# Altium PCB PFSMPS20.PcbDoc (part 3 of 3)
Units mm, origin at the board's own origin, x right, y up, seen from the top; angles counter-clockwise.
Board outline 225.58 x 155.55 mm, 3 copper layers (Top Layer, Mid-Layer 3, Bottom Layer); 286 components, 176 nets, 1075 pads, 309 vias.
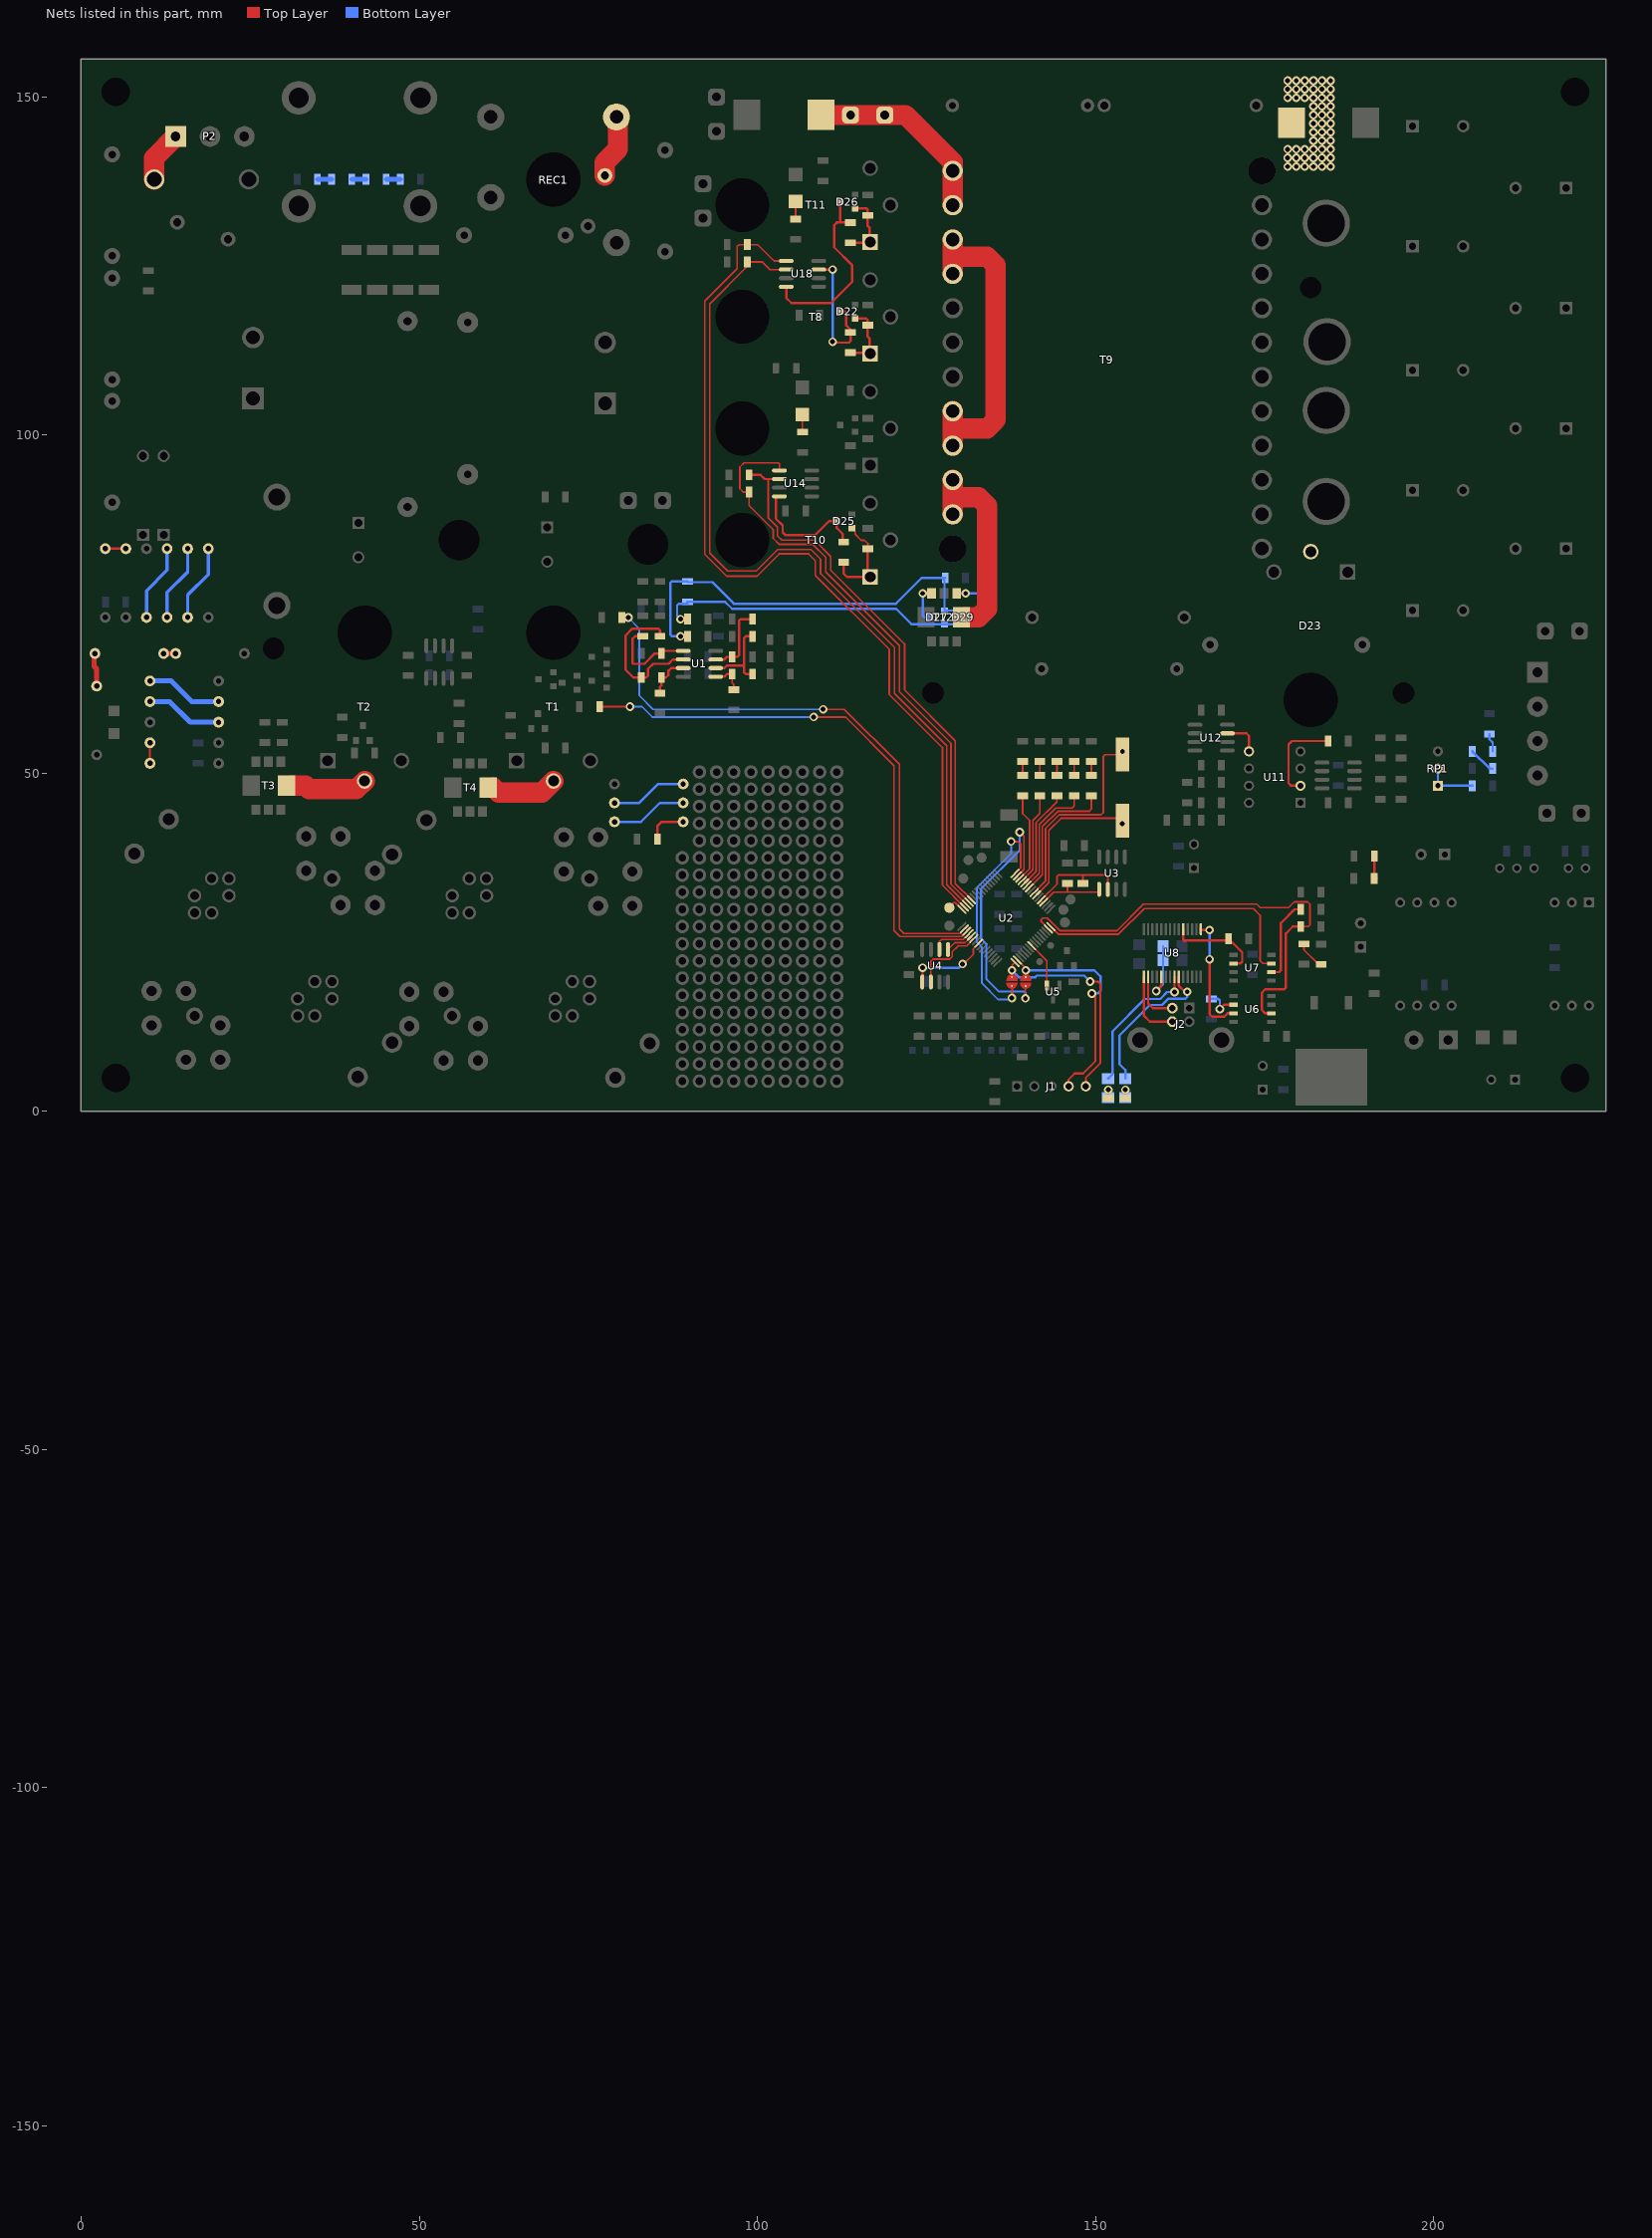
[diagram p3: the nets of this part, all layers, seen from the top]

## Via types
v1: diameter 1.27, hole 0.711, Top Layer to Bottom Layer, 309 vias

## Nets (pads, with @x,y where several pads share a name; then routed paths per layer and width w, separated by ;. In a path a pad name is that pad's centre, name@x,y a point inside that pad or via, vN(x,y) a via of type N, cw(c..) or ccw(c..) an arc to the next point about the centre after c; other vN are vias at no path point) (continued)
NetD22_1: D22.1 R77.1 R78.1 T8.1 | length 9.8
  Top Layer w0.35: R77.1@113.792,112.165 T8.1@116.556,112.165 ; D22.1@114.478,117.221 116.078,117.221 116.332,116.967 R78.1@116.332,116.229 116.332,114.554 116.586,114.3 116.586,112.134 T8.1@116.69,112.031
NetD22_3: D22.3 R77.2 U18.7 | length 20.4
  Top Layer w0.35: U18.7@109.08,124.46 v1(111.125,124.46) ; v1(111.125,113.792) 111.252,113.665 113.538,113.665 113.792,113.919 R77.2@113.792,115.165 113.792,115.57 113.157,116.205 113.157,117.983 112.903,118.237 D22.3@112.268,118.237
  Bottom Layer w0.35: v1@111.125,114.3 v1(111.125,124.46)
NetD23_2: D23.2 L8.1
  other v1: 178.435,139.7 179.705,139.7 180.975,139.7 182.245,139.7 183.515,139.7 184.785,139.7 178.435,140.97 179.705,140.97 180.975,140.97 182.245,140.97 183.515,140.97 184.785,140.97 178.435,142.24 179.705,142.24 180.975,142.24 182.245,142.24 183.515,142.24 184.785,142.24 182.245,143.51 183.515,143.51 184.785,143.51 182.245,144.78 183.515,144.78 184.785,144.78 182.245,146.05 183.515,146.05 184.785,146.05 182.245,147.32 183.515,147.32 184.785,147.32 182.245,148.59 183.515,148.59 184.785,148.59 178.435,149.86 179.705,149.86 180.975,149.86 182.245,149.86 183.515,149.86 184.785,149.86 178.435,151.13 179.705,151.13 180.975,151.13 182.245,151.13 183.515,151.13 184.785,151.13 178.435,152.4 179.705,152.4 180.975,152.4 182.245,152.4 183.515,152.4 184.785,152.4
NetD25_1: D25.1 R89.1 R91.1 T10.1 | length 14.5
  Top Layer w0.254: D25.1@113.97,86.233 114.452,85.75 114.452,85.319 115.341,84.43 115.875,84.43 116.332,83.972 R91.1@116.332,83.185
  Top Layer w0.35: R89.1@112.776,81.177 112.776,79.502 113.267,79.011 T10.1@116.69,79.011 116.332,79.368 R91.1@116.332,83.185
NetD25_3: D25.3 R89.2 U14.4 | length 18.1
  Top Layer w0.35: U14.4@102.743,90.805 102.743,87.63 103.759,86.614 103.759,85.598 104.14,85.217 108.585,85.217 110.617,87.249 D25.3@111.76,87.249 111.76,86.233 112.649,85.344 112.649,84.304 R89.2@112.776,84.177
NetD26_1: D26.1 R90.2 R92.2 T11.1 | length 9.8
  Top Layer w0.35: R90.2@113.792,128.421 116.571,128.421 T11.1@116.69,128.541 116.586,128.644 116.586,130.683 116.332,130.937 R92.2@116.332,132.485 116.332,133.35 116.205,133.477 D26.1@114.478,133.477
NetD26_3: D26.3 R90.1 U18.4 | length 28.4
  Top Layer w0.35: U18.4@104.28,121.92 104.28,120.256 105.029,119.507 110.871,119.507 114.046,122.682 114.046,125.095 111.379,127.762 111.379,131.04 111.76,131.421 112.117,131.421 ; D26.3@112.141,134.366 D26.3@112.268,134.493 112.268,131.572 112.117,131.421 ; R90.1@113.768,131.445 R90.1@113.792,131.421 112.117,131.421
NetD27_1: D27.1 D29.1 R2.1 R95.2 R99.1 | length 62.5
  Top Layer w0.35: v1(88.646,70.231) R2.1@89.686,70.231
  Bottom Layer w0.35: v1(88.646,70.231) 87.376,70.231 87.122,70.485 87.122,78.105 87.376,78.359 89.638,78.359 R95.2@89.662,78.335 89.765,78.232 93.345,78.232 96.52,75.057 120.498,75.057 124.308,78.867 R99.1@127.786,78.867 ; R99.1@127.532,78.613 127.686,78.459 D27.1@127.686,74.041 D29.1@131.572,74.041
NetD27_2: D27.2 D29.2 R5.1 R95.1 | length 48.2
  Top Layer w0.35: v1(88.646,72.771) R5.1@89.686,72.771
  Bottom Layer w0.35: v1(88.646,72.771) 88.138,73.279 88.138,74.803 88.392,75.057 R95.1@89.662,75.057 ; R95.1@89.662,75.335 95.226,75.335 96.266,74.295 120.523,74.295 122.809,72.009 D27.2@127.686,72.009 D29.2@131.572,72.009
NetD27_3: D27.3 T12.3 | length 5.7
  Top Layer w0.35: v1(124.46,76.581) T12.3@125.776,76.58 T12.3@125.776,76.58
  Bottom Layer w0.35: v1(124.46,76.581) 124.46,73.279 124.714,73.025 D27.3@125.476,73.025
NetD29_3: D29.3 T12.1 | length 10.3
  Top Layer w0.35: T12.1@129.476,76.58 v1(130.81,76.581) v1(130.81,76.581)
  Bottom Layer w0.35: D29.3@129.362,73.025 132.588,73.025 133.096,73.533 133.096,76.073 132.588,76.581 v1(130.81,76.581)
NetD30_A: D30.A R96.2 | length 2.6
  Top Layer w0.254: R96.2@106.68,100.433 D30.A@106.68,103.029
NetD36_A: D36.A R112.2 | length 2.6
  Top Layer w0.35: R112.2@105.664,131.929 D36.A@105.664,134.525
NetF1_1: F1.1 P2.1 | length 7.7
  Top Layer w3: F1.1@10.795,137.795 10.795,140.97 P2.1@13.97,144.145
NetJ1_4: J1.4 JP2.1 U2.18 | length 34.3
  Top Layer w0.3: U2.18@138.468,22.352 139.697,21.123 139.697,20.828 139.697,20.165 139.697,20 JP2.1@139.697,19.84 ; J1.4@146.05,3.683 146.05,4.699 146.939,5.588 148.209,5.588 149.987,7.366 149.987,16.891 v1(149.479,17.399)
  Bottom Layer w0.35: v1(139.7,20.828) 149.86,20.828 150.749,19.939 150.749,17.78 150.368,17.399 v1(149.479,17.399)
NetJ1_5: J1.5 JP1.2 U2.17 | length 32.5
  Top Layer w0.3: JP1.2@137.671,19.835 137.671,19.995 137.671,20.16 137.671,20.828 137.671,21.555 U2.17@138.115,21.999 ; J1.5@148.59,3.683 148.59,4.953 150.758,7.121 150.758,18.787 150.368,19.177 v1(149.225,19.177)
  Bottom Layer w0.35: v1(137.668,20.828) 138.678,19.818 141.103,19.818 141.351,20.066 148.336,20.066 v1(149.225,19.177)
NetJ2_2: J2.2 U8.16 | length 7.8
  Top Layer w0.35: U8.16@157.801,19.874 157.801,15.941 158.496,15.246 161.381,15.246 J2.2@161.386,15.251
NetJ2_3: J2.3 U8.15 | length 10.3
  Top Layer w0.35: U8.15@157.151,19.874 157.151,14.172 158.072,13.251 J2.3@161.386,13.251
NetJP1_1: JP1.1 U2.48 | length 36.9
  Top Layer w0.254: v1(137.541,39.878) 138.557,39.878 138.938,39.497 138.938,35.974 U2.48@138.115,35.151
  Top Layer w0.3: v1(137.643,16.739) 137.66,16.739 137.671,16.749 137.671,18.189 137.671,18.354 JP1.1@137.671,18.514
  Bottom Layer w0.254: v1(137.541,39.878) 137.541,38.1 132.461,33.02 132.461,25.019 133.223,24.257 133.223,18.923 135.636,16.51 137.414,16.51 v1(137.643,16.739)
NetJP2_2: JP2.2 U2.47 | length 41.2
  Top Layer w0.254: v1(138.811,41.275) 139.415,40.671 139.415,35.744 ; v1(139.649,16.688) 139.649,18.195 139.649,18.361 139.649,18.519 139.649,18.594 139.649,18.631 139.855,18.837
  Top Layer w0.3: U2.47@138.468,34.798 139.415,35.744
  Bottom Layer w0.3: v1(138.811,41.275) 138.811,38.608 133.096,32.893 133.096,25.527 133.858,24.765 133.858,19.558 135.692,17.724 139.452,17.724 139.649,17.526 v1(139.649,16.688)
NetL10_1: L10.1 P8.1 P8.2 T9.1 T9.2 | length 28.7
  Top Layer w3: L10.1@109.425,147.32 P8.1@113.792,147.32 P8.2@118.872,147.32 121.92,147.32 128.905,140.335 T9.1@128.905,139.065 T9.2@128.905,133.985
NetLED1_A: LED1.A R11.2 | length 2.1
  Top Layer w0.254: R11.2@139.255,49.657 LED1.A@139.255,51.713
NetLED2_A: LED2.A R12.2 | length 2.1
  Top Layer w0.254: R12.2@141.795,49.657 LED2.A@141.795,51.713
NetLED3_A: LED3.A R13.2 | length 2.1
  Top Layer w0.254: R13.2@144.335,49.657 LED3.A@144.335,51.713
NetLED4_A: LED4.A R14.2 | length 2.1
  Top Layer w0.254: R14.2@146.875,49.657 LED4.A@146.875,51.713
NetLED5_A: LED5.A R15.2 | length 2.1
  Top Layer w0.254: R15.2@149.415,49.657 LED5.A@149.415,51.713
NetLED6_A: LED6.A R47.2 | length 6
  Top Layer w0.35: LED6.A@85.217,40.259 85.217,42.164 85.852,42.799 R47.2@89.027,42.799
NetLED7_A: LED7.A R73.2 | length 3.3
  Top Layer w0.35: R73.2@191.238,34.417 191.262,34.441 LED7.A@191.262,37.719 ; R73.2@191.544,34.466 R73.2@191.568,34.442
NetLED9_A: LED9.A R75.2 | length 4.3
  Top Layer w0.254: R75.2@180.848,24.741 180.848,23.876 183.007,21.717 LED9.A@183.388,21.717
NetNTC1_1: NTC1.1 REC1.3 | length 9.5
  Top Layer w3: NTC1.1@77.45,138.37 77.45,140.315 79.375,142.24 79.375,146.82 REC1.3@79.168,147.027
NetR1_1: R1.1 R3.2 U1.2 | length 12.1
  Top Layer w0.35: U1.2@93.84,65.532 95.123,65.532 95.504,65.913 98.044,65.913 ; R1.1@99.29,64.643 98.298,64.643 98.044,64.897 98.044,65.913 ; R3.2@99.29,70.231 98.298,70.231 98.044,69.977 98.044,65.913
NetR1_2: R1.2 R4.2 U1.1 | length 5
  Top Layer w0.254: R1.2@96.29,64.643 96.266,64.619 96.266,63.373 96.52,63.119 R4.2@96.52,62.333
  Top Layer w0.35: U1.1@93.84,64.262 95.123,64.262 95.504,64.643 R1.2@96.29,64.643
NetR6_2: R6.2 R7.2 U1.3 | length 10.9
  Top Layer w0.35: U1.3@93.84,66.802 95.123,66.802 95.504,67.183 R7.2@96.29,67.183 97.028,67.183 97.282,67.437 97.282,72.517 97.536,72.771 R6.2@99.29,72.771
NetR11_1: R11.1 U2.46 | length 13.3
  Top Layer w0.254: U2.46@138.822,34.444 138.854,34.444 140.271,35.861 140.271,42.99 139.255,44.006 R11.1@139.255,46.657
NetR12_1: R12.1 U2.45 | length 13.7
  Top Layer w0.254: U2.45@139.175,34.09 140.77,35.685 140.77,42.98 141.795,44.005 R12.1@141.795,46.657
NetR13_1: R13.1 U2.44 | length 14.9
  Top Layer w0.254: U2.44@139.529,33.737 141.224,35.432 141.224,42.672 144.272,45.72 144.272,46.594 R13.1@144.335,46.657
NetR14_1: R14.1 U2.43 | length 17.6
  Top Layer w0.254: U2.43@139.882,33.383 141.713,35.214 141.713,42.399 144.169,44.855 146.582,44.855 146.875,45.148 R14.1@146.875,46.657
NetR15_1: R15.1 U2.42 | length 20.1
  Top Layer w0.254: U2.42@140.236,33.03 142.167,34.961 142.167,42.091 144.423,44.347 149.058,44.347 149.415,44.704 R15.1@149.415,46.657
NetR16_2: R16.2 U2.36 U3.5 | length 10.2
  Top Layer w0.254: U2.36@142.357,30.908 143.858,32.409 145.859,32.409 ; R16.2@145.859,33.703 145.859,32.409 ; U3.5@150.685,32.409 150.558,32.409 145.859,32.409
NetR17_2: R17.2 U2.37 U3.6 | length 15.2
  Top Layer w0.254: U2.37@142.004,31.262 144.335,33.593 144.335,34.734 144.55,34.949 148.145,34.949 ; R17.2@148.145,33.703 148.145,34.949 ; U3.6@151.828,32.803 151.828,34.568 151.447,34.949 148.145,34.949
NetR18_2: R18.2 R20.1 | length 2.1
  Bottom Layer w0.75: R20.1@45.105,137.795 R18.2@47.185,137.795
NetR19_2: R19.2 R21.1 | length 1.8
  Top Layer w0.75: R21.1@12.192,67.691 R19.2@13.97,67.691
NetR20_2: R20.2 R22.1 | length 2.1
  Bottom Layer w0.75: R22.1@40.025,137.795 R20.2@42.105,137.795
NetR21_2: R21.2 R23.1 | length 5
  Top Layer w0.75: R21.2@2.032,67.691 1.905,67.564 1.905,65.786 2.286,65.405 R23.1@2.286,62.865
NetR22_2: R22.2 R24.1 | length 2.1
  Bottom Layer w0.75: R24.1@34.945,137.795 R22.2@37.025,137.795
NetR25_2: R25.2 R26.1 | length 11.4
  Bottom Layer w0.5: R25.2@9.652,73.025 9.652,76.962 12.7,80.01 R26.1@12.7,83.185
NetR26_2: R26.2 R27.1 | length 11.4
  Bottom Layer w0.5: R26.2@12.7,73.025 12.7,76.708 15.748,79.756 R27.1@15.748,83.185
NetR27_2: R27.2 R28.1 | length 11.4
  Bottom Layer w0.5: R27.2@15.748,73.025 15.748,76.327 18.796,79.375 R28.1@18.796,83.185
NetR29_2: R29.2 R30.1 | length 2.9
  Top Layer w0.35: R29.2@3.556,83.185 R30.1@6.477,83.185
NetR31_2: R31.2 U6.2 | length 4.9
  Top Layer w0.35: v1(168.402,15.113) 169.037,15.748 U6.2@170.428,15.748
  Bottom Layer w0.35: R31.2@167.132,16.613 168.172,16.613 168.402,16.383 v1(168.402,15.113)
NetR32_2: R32.2 U2.31 U6.6 | length 68
  Top Layer w0.254: U2.31@143.064,26.949 141.986,28.027 141.986,28.321 142.24,28.575 142.875,28.575 144.78,26.67 153.162,26.67 157.099,30.607 173.863,30.607 174.371,30.099 178.562,30.099 179.43,30.967 181.377,30.967 181.737,30.607 181.737,27.559 181.483,27.305 R32.2@180.364,27.305
  Top Layer w0.35: U6.6@176.028,14.478 175.133,14.478 174.625,14.986 174.625,17.526 175.133,18.034 177.927,18.034 178.181,18.288 178.181,26.289 179.197,27.305 R32.2@180.364,27.305
NetR33_1: R33.1 U8.23 | length 22.8
  Top Layer w0.35: U8.23@162.351,19.874 162.351,18.528 163.226,17.653 v1(163.576,17.653)
  Bottom Layer w0.35: R33.1@154.432,4.829 154.432,6.096 153.543,6.985 153.543,11.176 158.073,15.706 159.851,15.706 160.758,16.613 163.298,16.613 163.576,16.891 v1(163.576,17.653)
NetR33_2: R33.2 TX_LED1.K | length 2.4
  Top Layer w0.254: TX_LED1.K@154.432,1.953 v1(154.432,3.175)
  Bottom Layer w0.35: R33.2@154.432,2.029 v1(154.432,3.175)
NetR34_1: R34.1 U8.22 | length 21.2
  Top Layer w0.35: U8.22@161.701,19.874 v1(161.701,17.623) v1@161.798,17.526
  Bottom Layer w0.35: R34.1@151.892,4.829 152.527,5.464 152.527,11.811 157.312,16.596 159.598,16.596 160.625,17.623 v1(161.701,17.623)
NetR34_2: R34.2 RX_LED1.K | length 2.4
  Top Layer w0.254: RX_LED1.K@151.892,1.953 151.892,3.15 v1(151.917,3.175)
  Bottom Layer w0.35: R34.2@151.892,2.029 151.892,3.15 v1(151.917,3.175)
NetR35_2: R35.2 U7.2 | length 12.3
  Top Layer w0.35: U7.2@176.028,20.574 177.165,20.574 177.419,20.828 177.419,27.813 179.451,29.845 R35.2@180.364,29.845
NetR36_2: R36.2 U7.6 U8.5 | length 13.8
  Top Layer w0.35: U8.5@163.001,26.924 163.001,25.34 163.068,25.273 169.696,25.273 169.926,25.273 171.728,23.471 171.728,22.122 171.45,21.844 U7.6@170.428,21.844
NetR37_1: R37.1 R38.2 U8.19 | length 9.4
  Top Layer w0.35: v1(159.004,17.78) 159.751,18.527 U8.19@159.751,19.874
  Bottom Layer w0.35: v1(159.004,17.78) 160.017,18.793 R37.1@160.017,22.352 R38.2@160.017,24.384
NetR39_2: R39.2 R41.1 | length 11.3
  Bottom Layer w0.35: R41.1@78.867,45.593 82.55,45.593 85.344,48.387 R39.2@89.027,48.387
NetR40_2: R40.2 R42.1 | length 11.5
  Top Layer w0.75: R42.1@20.32,60.706 R42.1@20.447,60.706
  Bottom Layer w0.75: R40.2@10.16,63.627 13.335,63.627 16.383,60.579 R42.1@20.32,60.579
NetR41_2: R41.2 R47.1 | length 11.3
  Bottom Layer w0.35: R47.1@78.867,42.799 82.804,42.799 85.598,45.593 R41.2@89.027,45.593
NetR42_2: R42.2 R48.1 | length 11.5
  Top Layer w0.75: R48.1@20.32,57.658 R48.1@20.447,57.658
  Bottom Layer w0.75: R42.2@10.16,60.579 13.081,60.579 16.129,57.531 R48.1@20.32,57.531
NetR50_2: R50.2 R56.1 | length 3
  Top Layer w0.35: R56.1@10.16,51.435 R50.2@10.16,54.483
NetR64_1: R64.1 U2.3 | length 83
  Top Layer w0.254: R64.1@76.684,59.817 v1(81.153,59.817) ; v1(108.331,58.293) 113.022,58.293 120.193,51.122 120.193,26.721 121.073,25.841 130.218,25.841 U2.3@130.973,26.595
  Bottom Layer w0.254: v1(81.153,59.817) 82.931,59.817 84.455,58.293 v1(108.331,58.293)
NetR65_1: R65.1 R67.2 U1.6 | length 22.6
  Top Layer w0.35: R67.2@85.598,70.255 R67.2@85.598,70.271 ; R67.2@85.852,70.525 R67.2@85.598,70.271 ; U1.6@89.04,66.802 87.503,66.802 86.868,66.167 84.582,66.167 83.82,65.405 83.82,64.389 83.566,64.135 R65.1@82.828,64.135 81.661,64.135 80.518,65.278 80.518,70.358 81.534,71.374 85.344,71.374 85.598,71.12 R67.2@85.598,70.271
NetR65_2: R65.2 R68.2 U1.7 | length 6.6
  Top Layer w0.35: R68.2@85.598,61.825 85.598,62.738 85.828,62.968 R65.2@85.828,64.135 86.487,64.135 86.868,64.516 86.868,65.151 87.249,65.532 U1.7@89.04,65.532
NetR70_2: R70.2 R72.2 U1.5 | length 13.6
  Top Layer w0.35: R70.2@83.058,70.255 81.939,70.255 81.558,69.874 81.558,66.27 81.661,66.167 83.312,66.167 84.836,67.691 R72.2@85.828,67.691 86.209,68.072 U1.5@89.04,68.072
NetR71_1: R71.1 U2.2 | length 90.5
  Top Layer w0.254: R71.1@79.986,73.025 80.899,73.025 v1(80.923,73.001) v1@81.026,72.898 ; v1(109.728,59.436) 112.87,59.436 121.006,51.3 121.006,26.949 121.66,26.295 129.966,26.295 U2.2@130.619,26.949
  Bottom Layer w0.254: v1(80.923,73.001) 82.55,71.374 82.55,61.468 84.582,59.436 v1(109.728,59.436)
NetR81_2: R81.2 U11.2 | length 13.7
  Top Layer w0.35: U11.2@180.34,48.133 178.943,48.133 178.562,48.514 178.562,54.229 179.07,54.737 R81.2@184.428,54.737
NetR82_2: R82.2 R86.1 | length 2.8
  Bottom Layer w0.35: R82.2@208.28,55.777 208.28,54.991 208.764,54.507 R86.1@208.764,53.213
NetR86_2: R86.2 R88.1 | length 4.1
  Bottom Layer w0.35: R86.2@205.764,53.213 208.304,50.673 R88.1@208.764,50.673
NetR93_1: R93.1 RP1.1 RP1.2 | length 7.6
  Bottom Layer w0.35: RP1.2@200.66,50.673 RP1.1@200.66,48.133 R93.1@205.764,48.133
NetR101_2: R101.2 U2.61 U14.1 | length 89
  Top Layer w0.254: U14.1@103.264,94.742 103.264,95.745 103.124,95.885 98.044,95.885 97.409,95.25 97.409,92.075 97.917,91.567 R101.2@98.782,91.567 98.782,89.575 102.362,85.995 102.362,84.709 103.251,83.82 108.204,83.82 110.109,81.915 110.109,79.756 121.031,68.834 121.031,62.027 128.651,54.407 128.651,33.584 U2.61@131.326,30.908
NetR106_2: R106.2 U2.60 U14.2 | length 82.2
  Top Layer w0.254: 101.6,93.472 101.6,87.757 102.997,86.36 102.997,85.09 103.632,84.455 108.458,84.455 110.871,82.042 110.871,80.01 121.793,69.088 121.793,62.281 129.286,54.788 129.286,33.656 U2.60@131.68,31.262
  Top Layer w0.35: R106.2@98.782,94.107 100.457,94.107 101.092,93.472 101.6,93.472 U14.2@103.264,93.472
NetR116_2: R116.2 U2.63 U18.1 | length 135.7
  Top Layer w0.254: U18.1@104.28,125.73 102.489,125.73 100.076,128.143 R116.2@98.528,128.143 97.282,128.143 97.028,127.889 97.028,124.587 92.242,119.801 92.242,82.358 95.479,79.121 99.949,79.121 103.251,82.423 107.569,82.423 108.585,81.407 108.585,79.248 119.507,68.326 119.507,61.646 127.381,53.772 127.381,33.44 U2.63@130.619,30.201
NetR120_2: R120.2 U2.62 U18.2 | length 131
  Top Layer w0.254: U18.2@104.28,124.46 101.854,124.46 100.711,125.603 R120.2@98.528,125.603 98.528,124.944 92.964,119.38 92.964,82.55 95.631,79.883 99.845,79.883 103.02,83.058 107.95,83.058 109.347,81.661 109.347,79.502 120.269,68.58 120.269,61.773 128.016,54.026 128.016,33.512 U2.62@130.973,30.555
NetT1_2: T1.2 T4.7 | length 9.9
  Top Layer w3: T4.7@60.96,47.879 61.722,47.117 68.134,47.117 T1.2@69.855,48.839
NetT2_2: T2.2 T3.7 | length 11.5
  Top Layer w3: T3.7@31.115,48.133 33.147,48.133 33.655,47.625 40.701,47.625 T2.2@41.915,48.839
NetT9_3: T9.3 T9.4 T9.8 T9.9 | length 46.8
  Top Layer w3: T9.9@128.905,98.425 128.905,100.965 ; T9.8@128.905,103.505 128.905,100.965 ; T9.4@128.905,123.825 128.905,126.365 ; T9.3@128.905,128.905 128.905,126.365 ; 128.905,100.965 133.985,100.965 135.255,102.235 135.255,125.095 133.985,126.365 128.905,126.365
NetT9_10: T9.10 T9.11 T12.8 | length 29.6
  Top Layer w3: T9.11@128.905,88.265 128.905,90.805 ; T9.10@128.905,93.345 128.905,90.805 ; T12.8@130.81,73.025 132.715,73.025 133.985,74.295 133.985,89.535 132.715,90.805 128.905,90.805
NetU2_4: U2.4 U4.6 | length 6
  Top Layer w0.254: U4.6@126.936,23.911 126.936,25.082 127.241,25.387 130.472,25.387 U2.4@131.326,26.242
NetU2_5: U2.5 U4.5 | length 4.3
  Top Layer w0.254: U4.5@128.206,23.911 129.206,24.911 130.703,24.911 U2.5@131.68,25.888
NetU2_6: U2.6 U4.2 | length 11.2
  Top Layer w0.254: U4.2@125.666,19.111 125.666,22.146 126.004,22.484 128.466,22.484 128.833,22.851 128.833,23.601 129.689,24.457 130.956,24.457 U2.6@132.033,25.534
NetU2_8: U2.8 U4.1 | length 12.6
  Top Layer w0.254: v1@124.333,21.336 v1(124.444,21.225) 124.444,19.159 U4.1@124.396,19.111 ; v1(130.353,21.768) 130.429,21.844 130.596,21.844 131.953,23.201 131.953,24.04 U2.8@132.741,24.827
  Bottom Layer w0.35: v1(124.444,21.225) 129.81,21.225 v1(130.353,21.768)
NetU2_24: U2.24 U5.2 | length 6.8
  Top Layer w0.254: U2.24@140.59,24.474 142.814,22.249 U5.2@142.814,18.603
NetU2_32: U2.32 U7.3 | length 41.9
  Top Layer w0.254: U2.32@143.418,27.302 144.533,26.187 153.441,26.187 157.226,29.972 173.355,29.972 174.371,28.956 174.371,22.225 174.752,21.844 U7.3@176.028,21.844
NetU6_3: U6.3 U8.1 | length 17.7
  Top Layer w0.35: U8.1@165.601,26.924 165.728,26.797 v1(166.878,26.797) ; v1(166.878,22.479) 166.878,14.351 167.259,13.97 169.037,13.97 169.545,14.478 U6.3@170.428,14.478
  Bottom Layer w0.35: v1(166.878,22.479) v1(166.878,26.797)
NetU11_5: U11.5 U12.3 | length 5.6
  Top Layer w0.35: U12.3@169.532,55.88 172.339,55.88 172.72,55.499 U11.5@172.72,53.213
OSC_N: C11.1 U2.39 X1.1 | length 23.2
  Top Layer w0.254: U2.39@141.297,31.969 143.129,33.802 143.129,41.529 144.931,43.331 153.585,43.331 X1.1@153.987,42.929
  Bottom Layer w0.35: v1(153.975,42.52) 153.987,42.508 C11.1@153.987,41.429
OSC_P: C10.2 U2.40 X1.2 | length 31.9
  Top Layer w0.254: U2.40@140.971,32.323 140.971,32.35 142.621,34.001 142.621,41.783 144.677,43.839 150.836,43.839 151.193,44.196 151.193,52.475 151.447,52.729 X1.2@153.987,52.729
  Bottom Layer w0.35: C10.2@153.987,54.229 153.987,53.201 v1(154,53.188)
PWM3: pad.8@128.397,30.099 U2.64 | length 2.7
  Top Layer w0.254: pad.8@128.397,30.099 128.397,30.226 129.032,30.861 129.253,30.861 U2.64@130.266,29.848
pads on no net: D9. D10. D11.2 D12.2 D13.2 D14.2 D18.2 D19.2 D21.2 D22.2 D23.M3 D25.2 D26.2 DC1.1 DC1.5 DC1.7 DC1.8 DC1.9 DC1.10 DC1.11 DC1.24 DC2.5 Designator7.1 Designator8.1 Designator9.1 Designator10.1 Designator11.1 Designator12.1 Designator13.1 Designator14.1 Designator15.1 Designator16.1 L2. L3. L4. L5. REC1.M6 T1.M3 T2.M3 T3.2 T3.4 T3.5 T3.6 T4.2 T4.4 T4.5 T4.6 T7.M3 T8.M3 T9. T9.5 T9.6 T9.7 T9.16 T9.17 T9.18 T10.M3 T11.M3 T12.2 T12.4 T12.5 T12.6 U2.49 U2.51 U2.53 U2.55 U3.1 U3.2 U3.3 U4.3 U6.1 U6.4 U7.1 U7.4 U8.2 U8.3 U8.6 U8.8 U8.9 U8.10 U8.11 U8.12 U8.13 U8.14 U8.24 U8.27 U8.28 U9.1 U9.5 U9.8 U10.1 U10.8 U11.7 U11.8 U12.1 U12.5 U12.8

## Polygon pours and split planes (outlines as drawn)
GND on Top Layer " " (solid, pour order 1000): 189.23,39.37 189.865,38.735 189.865,36.83 189.23,36.195 187.325,36.195 185.42,34.29 179.705,34.29 179.07,33.655 179.07,33.02 177.8,31.75 167.64,31.75 167.005,32.385 167.005,34.29 167.64,34.925 169.545,34.925 170.18,35.56 170.18,38.735 170.815,39.37
NetC32_2 on Top Layer " " (solid, pour order 1011): 77.47,74.93 78.105,75.565 78.105,85.725 77.47,86.36 72.39,86.36 71.755,85.725 71.755,83.82 71.12,83.185 67.945,83.185 67.31,83.82 67.31,110.49 67.945,111.125 79.375,111.125 80.01,111.76 80.01,118.11 79.375,118.745 54.61,118.745 53.975,119.38 53.975,121.92 53.34,122.555 22.86,122.555 22.225,121.92 22.225,111.76 23.495,110.49 31.75,110.49 32.385,109.855 32.385,93.345 33.02,92.71 44.45,92.71 45.085,92.075 45.085,75.565 45.72,74.93
GND_SEC on Top Layer " " (solid, pour order 1025): 209.55,148.59 210.185,147.955 210.185,139.7 210.82,139.065 214.63,139.065 215.265,138.43 215.265,75.565 214.63,74.93 212.725,74.93 212.09,74.295 212.09,58.42 212.725,57.785 223.52,57.785 224.155,57.15 224.155,42.545 223.52,41.91 205.105,41.91 204.47,42.545 204.47,64.77 203.835,65.405 194.31,65.405 193.675,66.04 193.675,137.795 194.31,138.43 200.025,138.43 200.66,139.065 200.66,147.955 201.295,148.59
NetC25_1 on Top Layer " " (solid, pour order 1004): 28.575,153.67 29.21,154.305 88.265,154.305 88.9,153.67 88.9,140.335 88.265,139.7 84.455,139.7 83.82,140.335 83.82,149.225 83.185,149.86 69.85,149.86 64.135,144.145 29.21,144.145 28.575,144.78
NetC23_2 on Top Layer " " (solid, pour order 1001): 29.21,142.875 53.975,142.875 54.61,142.24 54.61,130.81 53.975,130.175 36.195,130.175 35.56,130.81 35.56,136.525 34.925,137.16 29.21,137.16 27.305,135.255 22.225,135.255 21.59,135.89 21.59,140.335 22.225,140.97 27.305,140.97
NetD23_2 on Top Layer " " (solid, pour order 1013): 185.42,153.035 186.055,152.4 186.055,139.7 185.42,139.065 177.8,139.065 177.165,139.7 177.165,152.4 177.8,153.035
48V_OUT on Top Layer " " (solid, pour order 1027): 186.69,152.4 187.325,153.035 215.265,153.035 215.9,152.4 215.9,146.05 216.535,145.415 223.52,145.415 224.155,144.78 224.155,69.215 223.52,68.58 213.36,68.58 212.725,69.215 212.725,73.66 213.36,74.295 215.265,74.295 215.9,74.93 215.9,139.065 215.265,139.7 211.455,139.7 210.82,140.335 210.82,148.59 210.185,149.225 200.66,149.225 200.025,148.59 200.025,139.7 199.39,139.065 187.325,139.065 186.69,139.7
NetD10_2 on Top Layer " " (solid, pour order 1007): 38.1,43.18 45.72,35.56 45.72,25.4 44.45,24.13 44.45,13.97 41.91,11.43 27.94,11.43 27.305,12.065 27.305,36.83 26.67,37.465 19.05,37.465 18.415,38.1 18.415,48.895 19.177,49.657 26.416,49.657 26.416,46.609 23.495,46.609 22.86,45.974 22.86,43.815 23.495,43.18
NetD9_2 on Top Layer " " (solid, pour order 1002): 83.185,24.765 83.82,25.4 83.82,35.56 76.2,43.18 53.975,43.18 53.34,43.815 53.34,46.355 56.261,46.355 56.261,49.403 45.72,49.403 45.085,48.768 45.085,41.275 49.53,36.83 49.53,25.4 50.165,24.765
NetC70_2 on Top Layer " " (solid, pour order 1018): 175.26,153.035 175.895,152.4 175.895,142.24 175.26,141.605 172.72,141.605 172.085,140.97 172.085,137.16 172.72,136.525 177.165,136.525 177.8,137.16 177.8,137.795 178.435,138.43 192.405,138.43 193.04,137.795 193.04,127 192.405,126.365 171.45,126.365 170.815,125.73 170.815,78.105 171.45,77.47 178.435,77.47 179.07,78.105 179.07,85.09 179.705,85.725 187.96,85.725 188.595,86.36 188.595,93.345 189.23,93.98 192.405,93.98 193.04,93.345 193.04,72.39 192.405,71.755 166.37,71.755 165.735,72.39 165.735,152.4 166.37,153.035
NetC59_2 on Top Layer " " (solid, pour order 1012): 179.07,93.98 187.325,93.98 187.96,93.345 187.96,86.995 187.325,86.36 179.07,86.36 178.435,85.725 178.435,78.74 177.8,78.105 172.085,78.105 171.45,78.74 171.45,90.17 172.085,90.805 177.8,90.805 178.435,91.44 178.435,93.345 179.07,93.98
GND_SEC on Top Layer " " (solid, pour order 1022): 172.085,125.73 193.04,125.73 193.675,126.365 193.675,93.98 193.04,94.615 178.435,94.615 177.8,93.98 177.8,92.075 177.165,91.44 172.085,91.44 171.45,92.075 171.45,125.095
NetC49_1 on Top Layer " " (solid, pour order 1014): 209.55,12.065 209.55,6.985 210.185,6.35 210.185,2.54 210.82,1.905 215.265,1.905 215.9,2.54 215.9,10.16 216.535,10.795 220.98,10.795 221.615,11.43 221.615,22.225 220.98,22.86 210.185,22.86 209.55,22.225 209.55,12.065
NetC26_1 on Top Layer " " (solid, pour order 1019): 53.34,128.905 54.61,127.635 68.58,127.635 69.215,128.27 69.215,132.08 69.85,132.715 75.565,132.715 76.2,132.08 76.2,129.54 75.565,128.905 75.565,122.555 74.93,121.92 55.88,121.92 54.61,123.19 38.1,123.19 37.465,123.825 37.465,128.27 38.1,128.905
+3.3V on Top Layer " " (solid, pour order 1023): 172.72,8.255 172.72,1.27 173.355,0.635 192.405,0.635 193.04,1.27 193.04,13.335 192.405,13.97 177.8,13.97 177.165,13.335 177.165,9.525 176.53,8.89 173.355,8.89
+12V on Top Layer " " (solid, pour order 1020): 198.374,13.97 199.009,14.605 199.009,16.51 199.644,17.145 207.645,17.145 208.28,17.78 208.28,23.495 208.915,24.13 214.63,24.13 215.265,24.765 215.265,32.385 215.9,33.02 223.52,33.02 224.155,33.655 224.155,36.83 223.52,37.465 221.615,37.465 220.98,36.83 220.98,34.925 220.345,34.29 213.995,34.29 213.36,33.655 213.36,29.845 212.725,29.21 186.69,29.21 186.055,28.575 186.055,20.955 185.42,20.32 180.34,20.32 179.705,19.685 179.705,15.24 180.34,14.605 185.42,14.605 186.055,15.24 186.055,18.415 186.69,19.05 195.58,19.05 196.215,18.415 196.215,14.605 196.85,13.97
GND_SEC on Bottom Layer " " (solid, pour order 1029): 142.875,152.4 143.51,151.765 143.51,144.145 144.145,143.51 165.1,143.51 165.735,142.875 165.735,127 166.37,126.365 154.94,126.365 154.305,125.73 154.305,140.335 153.67,140.97 136.525,140.97 135.89,141.605 135.89,144.78 135.255,145.415 127.635,145.415 127,146.05 127,151.765 127.635,152.4
GND on Bottom Layer " " (solid, remove dead copper, pour order 1008): 169.545,57.785 170.18,57.15 170.18,40.005 170.815,39.37 186.055,39.37 186.69,38.735 186.69,9.525 186.055,8.89 173.355,8.89 173.355,29.845 172.72,30.48 154.305,30.48 153.67,29.845 153.67,10.16 153.035,9.525 150.495,9.525 149.86,8.89 149.86,1.27 149.225,0.635 114.935,0.635 114.3,1.143 114.3,51.435 113.665,52.07 100.965,52.07 100.33,52.705 100.33,59.69 100.965,60.325 105.41,60.325 106.045,60.96 106.045,66.675 106.68,67.31 132.08,67.31 141.605,57.785
NetC26_2 on Bottom Layer " " (solid, pour order 1021): 63.5,139.7 63.5,120.65 62.865,120.015 22.225,120.015 21.59,119.38 21.59,95.885 24.13,93.345 24.13,86.995 24.765,86.36 33.655,86.36 34.29,85.725 34.29,67.945 32.385,66.04 32.385,45.085 26.67,39.37 26.67,11.43 27.305,10.795 42.545,10.795 45.085,13.335 45.085,23.495 45.72,24.13 83.185,24.13 83.82,23.495 83.82,13.335 76.2,5.715 14.605,5.715 8.255,12.065 8.255,35.56 22.225,49.53 22.225,82.55 13.97,90.805 13.97,126.365 14.605,127 24.13,127 26.67,129.54 53.975,129.54 54.61,130.175 54.61,139.7 55.245,140.335 62.865,140.335
NetC25_2 on Bottom Layer " " (solid, pour order 1006): 81.915,153.67 82.55,153.035 82.55,126.365 81.915,125.73 76.835,125.73 76.2,126.365 76.2,129.54 76.835,130.175 76.835,132.08 75.565,133.35 75.565,142.24 74.93,142.875 46.355,142.875 45.72,143.51 45.72,153.035 46.355,153.67
NetC32_2 on Bottom Layer " " (solid, pour order 1005): 71.755,85.725 72.39,86.36 77.47,86.36 78.105,85.725 78.105,50.165 77.47,49.53 73.66,49.53 73.025,50.165 73.025,67.31 71.755,74.93
NetC32_1 on Bottom Layer " " (solid, pour order 1009): 114.3,120.015 120.65,120.015 121.285,119.38 121.285,94.615 120.65,93.98 113.03,93.98 112.395,93.345 112.395,91.44 111.76,90.805 94.107,90.805 90.932,87.63 71.755,87.63 71.12,86.995 71.12,85.09 70.485,84.455 50.165,84.455 49.53,85.09 36.195,85.09 35.56,85.725 35.56,86.995 34.925,87.63 26.035,87.63 25.4,88.265 25.4,94.615 22.86,97.155 22.86,108.585 23.495,109.22 113.03,109.22 113.665,109.855 113.665,119.38
NetD9_2 on Bottom Layer " " (solid, pour order 1015): 49.53,25.4 50.165,24.765 83.185,24.765 83.82,25.4 83.82,35.56 76.2,43.18 76.2,48.26 75.565,48.895 73.025,48.895 72.39,49.53 72.39,67.31 71.12,74.93 71.12,82.55 70.485,83.185 62.23,83.185 61.595,82.55 61.595,50.165 49.53,38.1
NetC32_2 on Bottom Layer " " (solid, pour order 1003): 45.085,83.185 45.72,83.82 48.895,83.82 49.53,83.185 59.69,83.185 60.325,82.55 60.325,75.565 59.69,74.93 50.8,74.93 50.165,74.295 50.165,50.165 49.53,49.53 45.72,49.53 45.085,50.165
NetD10_2 on Bottom Layer " " (solid, pour order 1010): 34.925,83.185 35.56,83.82 43.815,83.82 44.45,83.185 44.45,49.53 45.085,48.895 47.625,48.895 48.26,48.26 48.26,25.4 47.625,24.765 45.085,24.765 44.45,24.13 44.45,13.97 41.91,11.43 27.94,11.43 27.305,12.065 27.305,38.735 33.02,44.45 33.02,65.405 34.925,67.31
NetC32_2 on Bottom Layer " " (solid, pour order 1016): 23.495,110.49 107.95,110.49 108.585,111.125 108.585,125.73 109.22,126.365 121.92,126.365 122.555,125.73 122.555,93.345 121.92,92.71 114.935,92.71 114.3,92.075 114.3,88.265 114.935,87.63 125.73,87.63 126.365,88.265 126.365,142.24 125.73,142.875 103.505,142.875 102.87,142.24 90.805,142.24 90.17,141.605 90.17,125.095 89.535,124.46 65.405,124.46 64.77,123.825 64.77,119.38 64.135,118.745 23.495,118.745 22.86,118.11 22.86,111.125
48V_OUT on Bottom Layer " " (solid, pour order 1031): 223.52,145.415 224.155,144.78 224.155,58.42 223.52,57.785 205.105,57.785 204.47,58.42 204.47,64.77 203.835,65.405 179.705,65.405 179.07,66.04 179.07,70.485 179.705,71.12 193.675,71.12 194.31,71.755 194.31,152.4 194.945,153.035 215.265,153.035 215.9,152.4 215.9,146.05 216.535,145.415
NetD23_2 on Bottom Layer " " (solid, pour order 1032): 193.04,153.035 193.675,152.4 193.675,72.39 193.04,71.755 179.705,71.755 179.07,72.39 179.07,85.09 179.705,85.725 187.96,85.725 188.595,86.36 188.595,135.89 187.96,136.525 178.435,136.525 177.8,137.16 177.8,152.4 178.435,153.035
NetC70_2 on Bottom Layer " " (solid, pour order 1017): 172.72,136.525 177.165,136.525 177.8,135.89 187.325,135.89 187.96,135.255 187.96,127.635 187.325,127 167.005,127 166.37,127.635 166.37,142.875 165.735,143.51 165.735,151.765 166.37,152.4 175.26,152.4 175.895,151.765 175.895,142.24 175.26,141.605 172.72,141.605 172.085,140.97 172.085,137.16 172.72,136.525
GND_SEC on Bottom Layer " " (solid, pour order 1028): 178.435,66.04 177.8,65.405 165.1,65.405 164.465,64.77 164.465,62.865 163.83,62.23 154.94,62.23 154.305,62.865 154.305,125.73 154.94,126.365 187.325,126.365 187.96,125.73 187.96,95.25 187.325,94.615 178.435,94.615 177.8,93.98 177.8,92.075 177.165,91.44 160.02,91.44 159.385,90.805 159.385,71.755 160.02,71.12 177.8,71.12 178.435,70.485
NetC59_2 on Bottom Layer " " (solid, pour order 1030): 177.8,90.805 178.435,91.44 178.435,93.345 179.07,93.98 187.325,93.98 187.96,93.345 187.96,86.995 187.325,86.36 179.07,86.36 178.435,85.725 178.435,72.39 177.8,71.755 160.655,71.755 160.02,72.39 160.02,90.17 160.655,90.805
NetC49_2 on Bottom Layer " " (solid, pour order 1024): 220.98,32.385 221.615,31.75 221.615,23.495 220.98,22.86 210.82,22.86 210.185,22.225 210.185,2.54 209.55,1.905 194.945,1.905 194.31,2.54 194.31,12.7 194.945,13.335 206.375,13.335 207.01,13.97 207.01,24.13 207.645,24.765 215.9,24.765 216.535,25.4 216.535,31.75 217.17,32.385
GND on Bottom Layer " " (solid, pour order 1026): 205.105,13.97 205.74,14.605 205.74,25.4 206.375,26.035 214.63,26.035 215.265,26.67 215.265,33.02 215.9,33.655 220.345,33.655 220.98,34.29 220.98,39.37 220.345,40.005 218.44,40.005 217.805,39.37 217.805,34.925 217.17,34.29 213.995,34.29 213.36,33.655 213.36,29.845 212.725,29.21 186.69,29.21 186.055,28.575 186.055,9.525 185.42,8.89 173.99,8.89 173.355,8.255 173.355,5.715 173.99,5.08 191.135,5.08 191.77,5.715 191.77,19.685 192.405,20.32 200.025,20.32 200.66,19.685 200.66,17.145 201.295,16.51 201.295,14.605 201.93,13.97

## Silkscreen, mask and mechanical layers (free items; w line width, h text height)
Top Overlay:
  lines w0.254: 87.376,2.54 91.44,2.54 113.284,2.54 113.284,51.562 90.17,51.562 90.17,44.45 90.17,38.862 87.376,38.862 87.376,34.544 87.376,2.54
Bottom Solder:
  lines w3: 18.415,90.805 28.956,80.264
Board:
  the board outline again, w0.254
Heatsink:
  rectangle: 18.41,53.225 23.41,153.225
  rectangle: 200.41,53.225 205.41,153.225
  rectangle: 32.41,53.225 37.41,153.225
  rectangle: 46.41,53.225 51.41,153.225
  rectangle: 74.41,53.225 79.41,153.225
  rectangle: 60.41,53.225 65.41,153.225
  rectangle: 102.41,53.225 107.41,153.225
  rectangle: 88.41,53.225 93.41,153.225
  rectangle: 130.41,53.225 135.41,153.225
  rectangle: 116.41,53.225 121.41,153.225
  rectangle: 158.41,53.225 163.41,153.225
  rectangle: 144.41,53.225 149.41,153.225
  rectangle: 186.41,53.225 191.41,153.225
  rectangle: 172.41,53.225 177.41,153.225
  lines w0.254: 18.41,53.225 18.41,153.225 205.41,153.225 205.41,53.225 18.41,53.225
Mechanical 16:
  drawing of 1882 lines, arcs and shapes, not listed
  text "1" at -10.888,858.901 h1.78
  text "2" at 38.151,858.901 h1.78
  text "3" at 87.41,858.901 h1.78
  text "4" at 136.703,858.901 h1.78
  text "5" at 185.979,858.901 h1.78
  text "6" at 235.001,858.901 h1.78
  text "7" at 284.531,858.901 h1.78
  text "8" at 333.553,858.901 h1.78
  text "A" at -33.02,824.916 h1.78
  text "A" at 355.6,824.916 h1.78
  text "B" at 355.6,754.304 h1.78
  text "B" at -33.02,736.524 h1.78
  text "C" at -33.02,683.692 h1.78
  text "C" at 355.6,683.692 h1.78
  text "D" at -33.02,613.588 h1.78
  text "D" at 355.6,613.588 h1.78
  text "ENGINEER:" at 240.665,613.41 h1.14
  text "TITLE:" at 278.765,613.41 h1.14
  text "PCB DESIGNER:" at 240.665,605.917 h1.14
  text "DATE:" at 240.665,598.17 h1.14
  text "PART NO.:" at 278.765,598.17 h1.14
  text "REV:" at 332.105,598.17 h1.14
  text "Altium Limited" at 207.645,595.63 h1.78
  text ".PRINT_DATE" at 241.935,595.122 h1.78
  text "12a Rodborough Rd" at 207.645,593.09 h1.78
  text "Frenchs Forest" at 207.645,590.55 h1.78
  text "FILE NAME:" at 240.665,590.55 h1.14
  text "DWG NO:" at 278.765,590.55 h1.14
  text "SCALE:" at 332.105,590.55 h1.14
  text "NSW 2086" at 207.645,588.01 h1.78
  text ".PCB_FILE_NAME_NO_PATH" at 241.935,587.502 h1.78
  text "1" at -10.888,582.041 h1.78
  text "2" at 38.151,582.041 h1.78
  text "3" at 87.41,582.041 h1.78
  text "4" at 136.703,582.041 h1.78
  text "5" at 185.979,582.041 h1.78
  text "6" at 235.001,582.041 h1.78
  text "7" at 284.531,582.041 h1.78
  text "8" at 333.553,582.041 h1.78

## Text inside footprints (layer, text, board x,y; h text height)
C2: Top Overlay "+" at 165.342,32.244 h1.5 r90
C32: Top Overlay "+" at 26.15,97.685 h1.5 r90
C33: Top Overlay "+" at 78.229,96.949 h1.5 r90
C42: Top Overlay "+" at 226.375,83.935 h1.5 r180
C43: Top Overlay "+" at 190.185,73.291 h1.5
C49: Top Overlay "+" at 215.787,5.421 h1.5 r180
C50: Top Overlay "+" at 189.98,20.588 h1.5 r90
C53: Top Overlay "+" at 205.401,38.723 h1.5 r180
C56: Top Overlay "+" at 190.185,127.139 h1.5
C57: Top Overlay "+" at 226.375,137.275 h1.5 r180
C58: Top Overlay "+" at 190.185,108.851 h1.5
C63: Top Overlay "+" at 175.502,-0.522 h1.5 r90
C68: Top Overlay "+" at 226.375,101.715 h1.5 r180
C69: Top Overlay "+" at 190.185,144.919 h1.5